# Altium PCB PCB2.PcbDoc
Units mm, origin at the board's own origin, x right, y up, seen from the top; angles counter-clockwise.
Board outline 40.13 x 34.16 mm, 2 copper layers (Top Layer, Bottom Layer); 10 components, 6 nets, 34 pads, 0 vias.
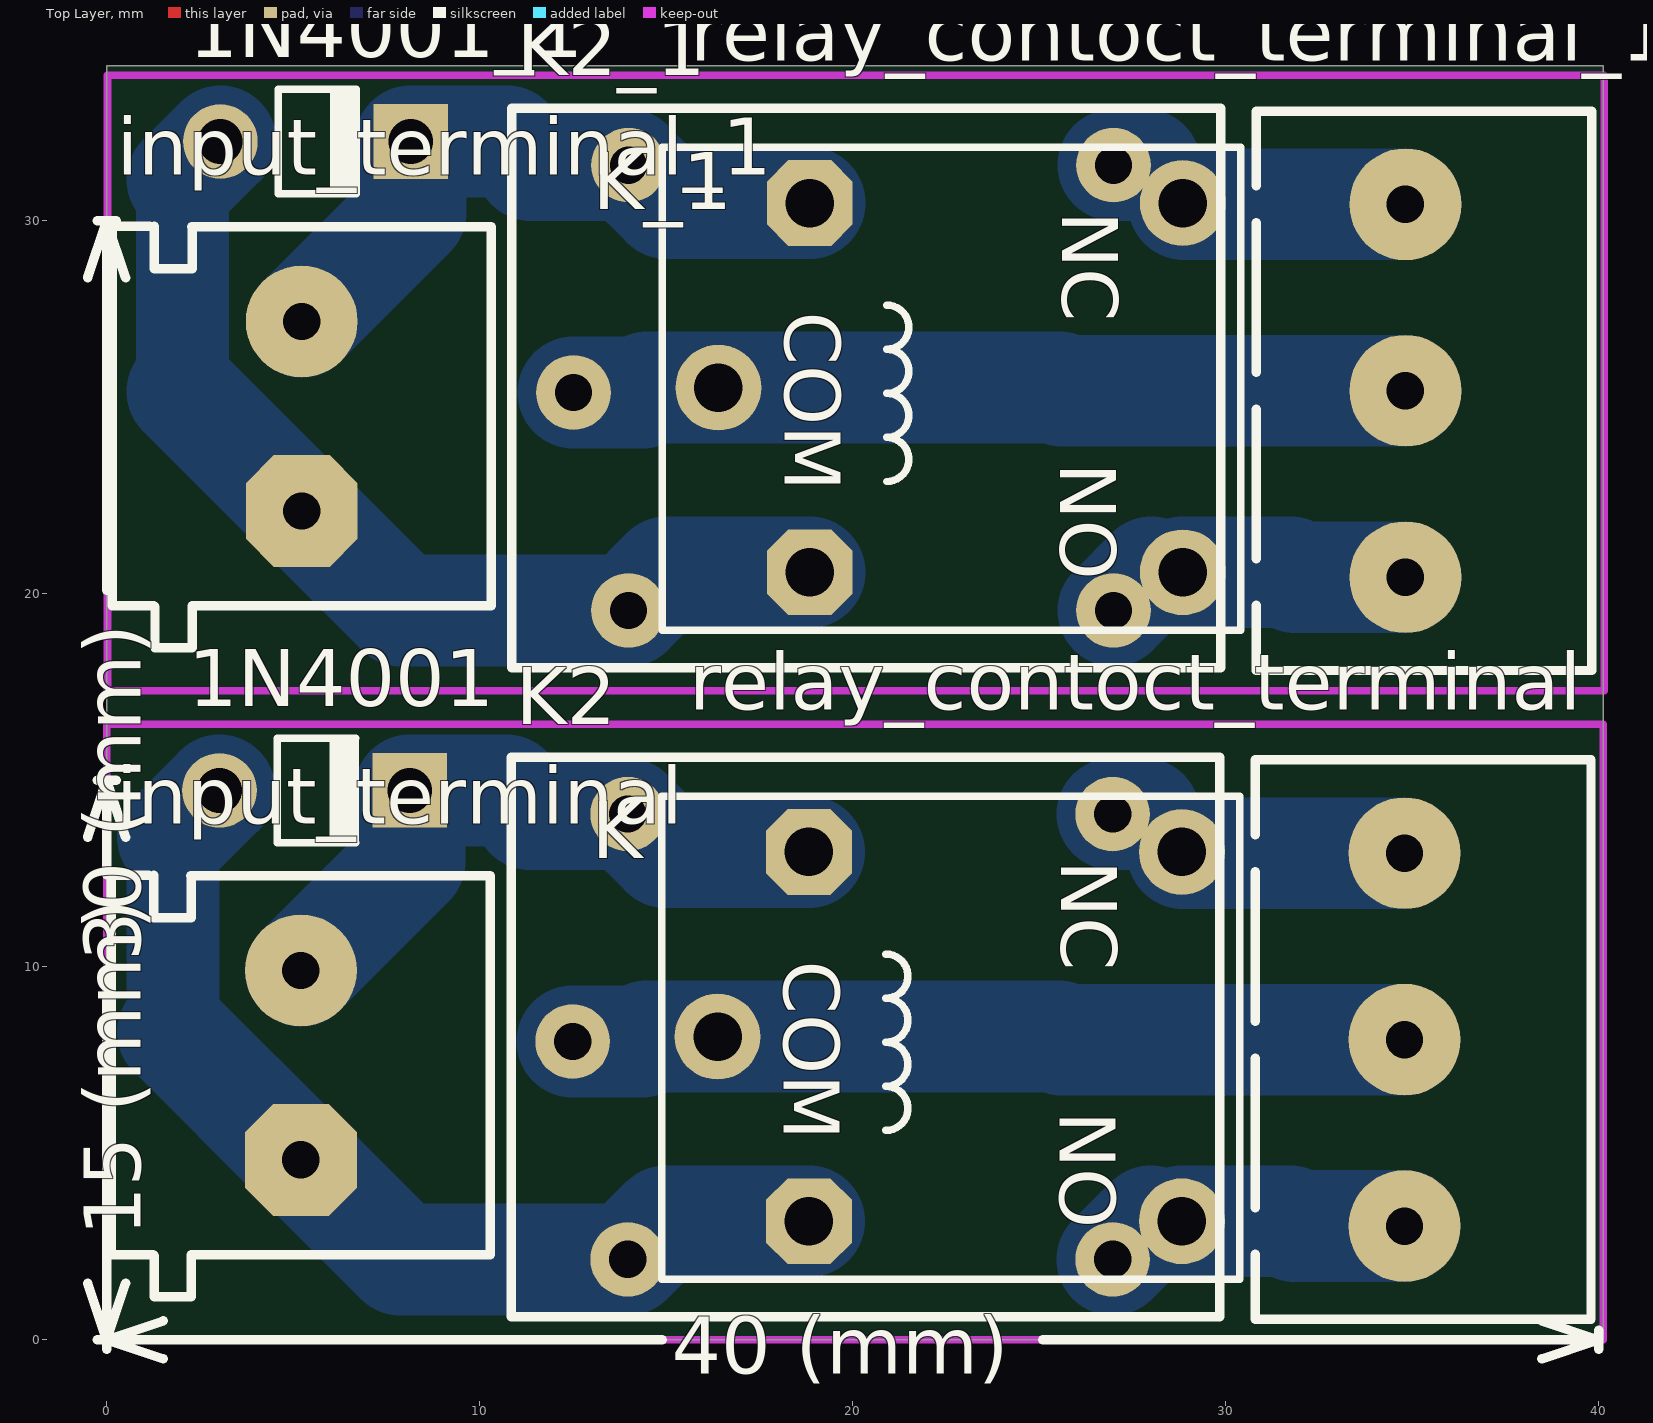
[diagram p0: Top Layer view]
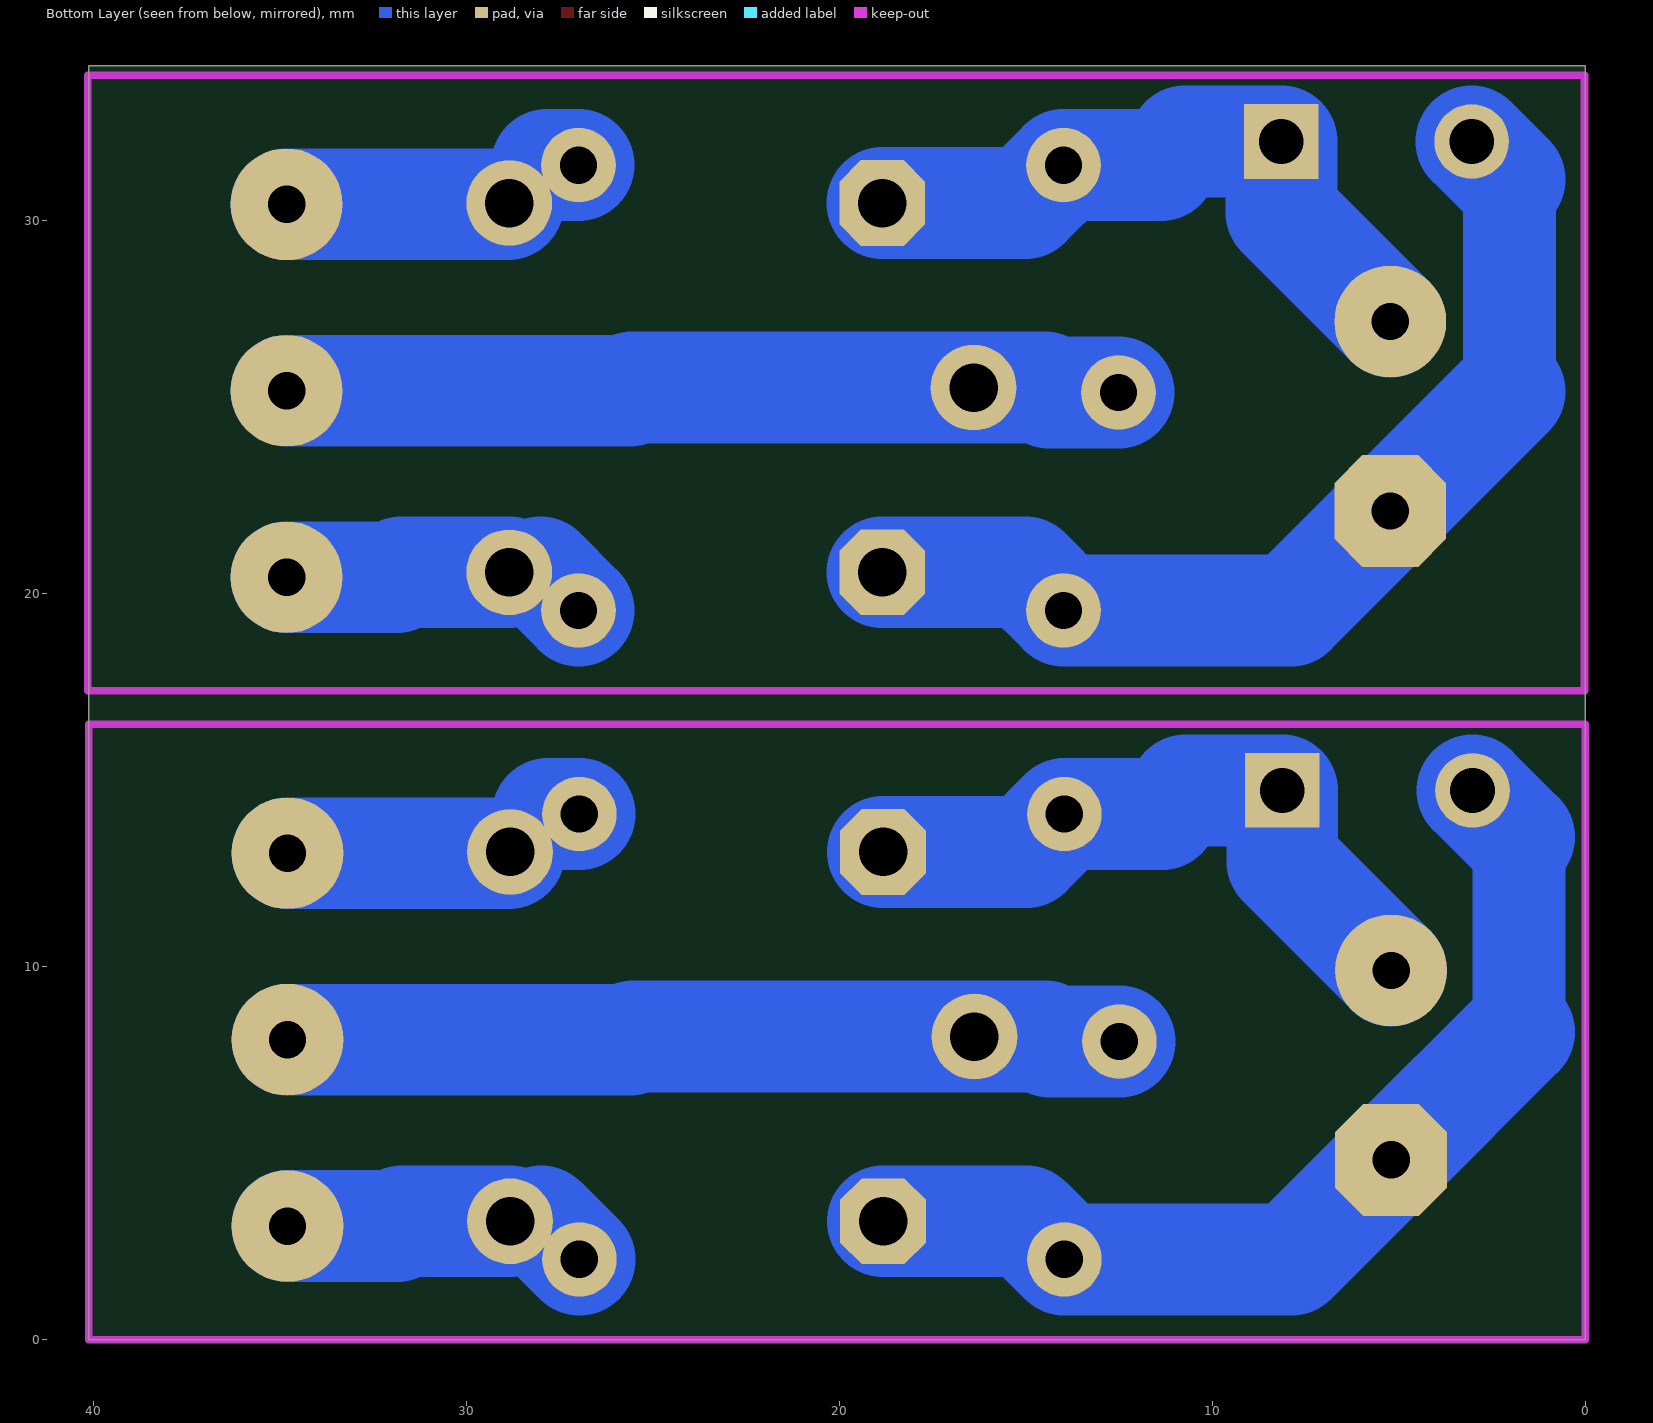
[diagram p1: Bottom Layer view, seen from below]

## Layer stack, top to bottom
Top Solder: solder mask 0.0102, Solder Resist, Dk 3.5
Top Layer: signal copper 0.0356
Dielectric 1: dielectric 0.32, FR-4, Dk 4.8
Bottom Layer: signal copper 0.0356
Bottom Solder: solder mask 0.0102, Solder Resist, Dk 3.5

## Board outline
0,0 40.132,0 40.132,34.163 0,34.163

## Design rules (kind name [scope] priority, off if disabled: settings)
Clearance [All] p1: gap=0.3 ignorepadtopadclearanceinfootprint=FALSE
DiffPairsRouting [All] p1: maxlimit=0.7 minlimit=0.4 mostfreqgap=0.5 toplayer_minwidth=0.3 toplayer_maxwidth=1 toplayer_prefwidth=0.5 bottomlayer_minwidth=0.3 bottomlayer_maxwidth=1 bottomlayer_prefwidth=0.5 maxuncoupledlength=12.7
PolygonConnect [All] p1: connectstyle=Relief reliefconductorwidth=0.254 reliefentries=4 polygonreliefangle="90 Angle" airgapwidth=0.254
RoutingLayers [All] p1: top layer_v5=FALSE bottom layer_v5=TRUE
RoutingVias [All] p1: holewidth=0.8 width=1.5 viastyle="Through Hole" minholewidth=0.4 minwidth=1 maxholewidth=1 maxwidth=2
SolderMaskExpansion [All] p1: expansion=0.102
Width [All] p1: maxlimit=1 minlimit=0.3 preferedwidth=0.5
28 further rules are at their usual default settings.

## Classes and differential pairs
component class Sheet1: 1N4001 input_terminal K K2 relay_contoct_terminal

## Components (designator, comment, footprint, x,y, rotation, side; value= is the part's Value field where it differs from the comment)
1N4001 "Diode 1N4007 vertical" "D 50mm" 8.255,14.732 r0 top
1N4001_1 "Diode 1N4007 vertical" "D 50mm" 8.278,32.131 r0 top (schematic designator 1N4001)
input_terminal "CON2 pin blue" My_CN2 0.114,2.299 r90 top
input_terminal_1 "CON2 pin blue" My_CN2 0.137,19.698 r90 top (schematic designator input_terminal)
K "Relay" "Relay 15.40x12.10x13.10" 16.379,8.131 r270 top
K2 "Relay-05vDC" Relays 10.843,15.621 r270 top
K2_1 "Relay-05vDC" Relays 10.866,33.02 r270 top (schematic designator K2)
K_1 "Relay" "Relay 15.40x12.10x13.10" 16.402,25.53 r270 top (schematic designator K)
relay_contoct_terminal "Terminal" "Terminal 1*3" 30.798,15.548 r270 top
relay_contoct_terminal_1 "Terminal" "Terminal 1*3" 30.821,32.947 r270 top (schematic designator relay_contoct_terminal)

## Footprints (in the part's own frame and the unit in brackets; to place one, negate y for a bottom-side part, rotate by r counter-clockwise, add the part's x,y. Pads: shape width x height; smd on the part's side, far side on the other; paste and mask are expansions set on the pad)
"D 50mm" [mm] "50mm Pin Spacing"
  round 2 hole 1.2: 1(-5.23,0)
  rect 2x2 hole 1.2: 2(-0.127,0)
  silkscreen extent -3.68,-1.4 -1.49,1.4
My_CN2 [mm]
  oct 3x3 hole 1: 1(2.527,-5.093)
  round 3 hole 1: 2(7.607,-5.093)
  silkscreen extent -1.14,-10.17 10.16,-0.01
"Relay 15.40x12.10x13.10" [mm]
  round 2.3 hole 1.3: 1(0,0) 2(-4.95,12.45) 3(4.95,12.45)
  oct 2.3x2.3 hole 1.3: 4(-4.95,2.45) 5(4.95,2.45)
  silkscreen extent -6.45,-1.5 6.5,14, body extent -6.05,-1.3 6.05,14, height 15.6
Relays [mm]
  round 2 hole 1: 1(7.62,1.651) 2(1.524,16.129) 3(13.462,16.129) 4(1.524,3.127) 5(13.462,3.127)
  silkscreen extent 0,0 15,19
"Terminal 1*3" [mm]
  round 3 hole 1: 1(2.5,4) 2(7.5,4) 3(12.5,4)
  silkscreen extent 0,0 15,9

## Part data
1N4001 1N4001_1: "1 Amp General Purpose Rectifier", Publisher="seyed mohsen ghasemian"
input_terminal input_terminal_1: "Connector blue screw"
K K_1: "SPDT Relay", Company=E.P.I.L, Design_Date=2011/10/31, Designer="Eng. Saeid Jorablo"
K2 K2_1: "Relay-05vDC-240AC 5A", ComponentLinkURL=www.picpars.com, Designer="Seyed Mohsen Ghasemain"
relay_contoct_terminal relay_contoct_terminal_1: library part "Terminal 1*3", "Terminal 3 Pin 250VAC 16A", ComponentLinkURL=www.picpars.com, Designer="Seyed Mohsen Ghasemain", E-mail=picpars@gmail.com

## Nets (pads, with @x,y where several pads share a name; then routed paths per layer and width w, separated by ;. In a path a pad name is that pad's centre, name@x,y a point inside that pad or via, vN(x,y) a via of type N, cw(c..) or ccw(c..) an arc to the next point about the centre after c; other vN are vias at no path point)
GND: 1N4001.1 input_terminal.1 K2.5 K.5 | length 27
  Bottom Layer w2.5: 1.778,8.255 1.778,13.485
  Bottom Layer w3: 1.778,8.255 input_terminal.1 7.874,2.159 K2.5 14.992,3.181 K.5 ; 1.778,13.485 1N4001.1
NetK2_1: K2.1 K.1 relay_contoct_terminal.2 | length 22.4
  Bottom Layer w0.5: 14.351,8.001 14.481,8.131 ; 25.527,8.131 25.61,8.048
  Bottom Layer w3: K2.1 14.351,8.001 ; 14.481,8.131 K.1 25.527,8.131 ; 25.61,8.048 relay_contoct_terminal.2
NetK2_2: K2.2 K.2 relay_contoct_terminal.1 | length 8.3
  Bottom Layer w0.5: K2.2@27.813,14.097 K.2
  Bottom Layer w1: K.2 K.2@28.862,13.048
  Bottom Layer w3: K2.2 K2.2@27.813,14.097 ; K.2@28.862,13.048 relay_contoct_terminal.1
NetK2_3: K2.3 K.3 relay_contoct_terminal.3 | length 8.3
  Bottom Layer w0.5: K.3@27.994,3.181 K.3 ; 31.725,3.181 31.858,3.048
  Bottom Layer w3: K2.3 K.3@27.994,3.181 ; K.3 31.725,3.181 ; 31.858,3.048 relay_contoct_terminal.3
NetLED_1: 
VCC: 1N4001.2 input_terminal.2 K2.4 K.4 | length 17.4
  Bottom Layer w0.5: 10.719,14.732 11.354,14.097
  Bottom Layer w3: input_terminal.2 8.128,12.827 1N4001.2 10.719,14.732 ; 11.354,14.097 K2.4 14.986,13.081 K.4
pads on no net: 1N4001_1.1 1N4001_1.2 input_terminal_1.1 input_terminal_1.2 K2_1.1 K2_1.2 K2_1.3 K2_1.4 K2_1.5 K_1.1 K_1.2 K_1.3 K_1.4 K_1.5 relay_contoct_terminal_1.1 relay_contoct_terminal_1.2 relay_contoct_terminal_1.3
copper on no net: | length 83.2
  Bottom Layer w0.5: 10.742,32.131 11.377,31.496 ; 14.374,25.4 14.504,25.53 ; 25.55,25.53 25.633,25.447 ; 27.836,31.496 28.852,30.48 ; 28.017,20.58 28.852,20.58 ; 31.748,20.58 31.881,20.447
  Bottom Layer w1: 28.852,30.48 28.885,30.447
  Bottom Layer w2.5: 2.032,25.423 2.032,31.115
  Bottom Layer w3: 2.032,25.423 5.23,22.225 7.897,19.558 13.993,19.558 15.015,20.58 18.852,20.58 ; 2.032,31.115 3.048,32.131 ; 5.23,27.305 8.151,30.226 8.151,32.131 10.742,32.131 ; 11.377,31.496 13.993,31.496 15.009,30.48 18.852,30.48 ; 12.517,25.4 14.374,25.4 ; 14.504,25.53 16.402,25.53 25.55,25.53 ; 25.633,25.447 34.821,25.447 ; 26.995,19.558 28.017,20.58 ; 26.995,31.496 27.836,31.496 ; 28.852,20.58 31.748,20.58 ; 28.885,30.447 34.821,30.447 ; 31.881,20.447 34.821,20.447

## Polygon pours and split planes (outlines as drawn)
GND on Bottom Layer "Bottom Layer-No Net" (solid, remove dead copper, pour order 0): 0,0 0,16.51 40.132,16.51 40.132,0
no net on Keep-Out Layer "GND_L02_P-001" (none): 0.023,17.399 0.023,33.909 40.155,33.909 40.155,17.399
no net on Keep-Out Layer "GND_L02_P-001" (none): 0,0 0,16.51 40.132,16.51 40.132,0

## Silkscreen, mask and mechanical layers (free items; w line width, h text height)
Top Overlay:
  lines w0.254: -0.508,13.476 0,15 ; -0.508,28.476 0,30 ; -0.254,15 0.254,15 ; -0.254,30 0.254,30 ; 0,-0.254 0,0.254 ; 0,2.523 0,0 ; 0,9.896 0,0 ; 0,12.477 0,15 ; 0,20.104 0,30 ; 0.508,13.476 0,15 ; 0.508,28.476 0,30 ; 1.524,-0.508 0,0 ; 1.524,0.508 0,0 ; 14.896,0 0,0 ; 25.104,0 40,0 ; 38.476,-0.508 40,0 ; 38.476,0.508 40,0 ; 40,-0.254 40,0.254 ; 0,0 0.508,1.524 0,0 ; 0,0 -0.508,1.524 0,0 ; -0.254,0 0.254,0 -0.254,0
  text "30 (mm)" at 0.914,10.15 h1.52 r90
  text "15 (mm)" at 0.914,2.777 h1.52 r90
  text "40 (mm)" at 15.15,-0.914 h1.52

## Text inside footprints (layer, text, board x,y; h text height)
K: Top Overlay "COM" at 18.157,10.163 h1.5 r270; Top Overlay "NO" at 25.548,6.124 h1.5 r270; Top Overlay "NC" at 25.599,12.855 h1.5 r270
K_1: Top Overlay "COM" at 18.18,27.562 h1.5 r270; Top Overlay "NO" at 25.571,23.523 h1.5 r270; Top Overlay "NC" at 25.622,30.254 h1.5 r270